# EAGLE board rf-template (EAGLE 6.4)
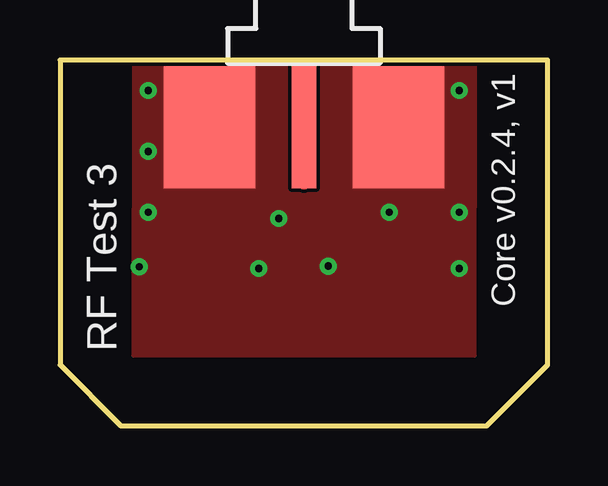
[diagram p0: board, top side]
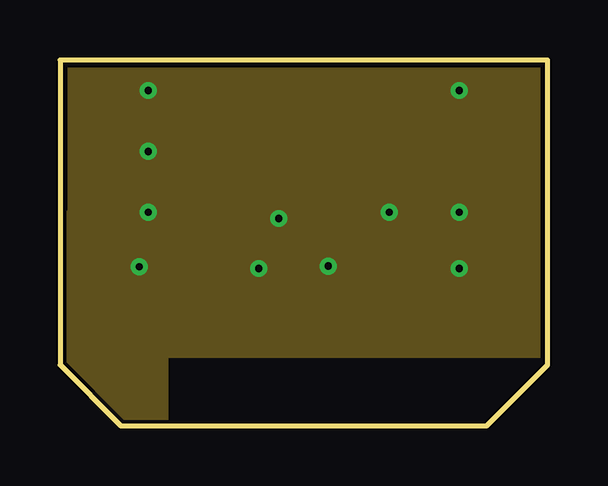
[diagram p1: board, inner layer $GND]
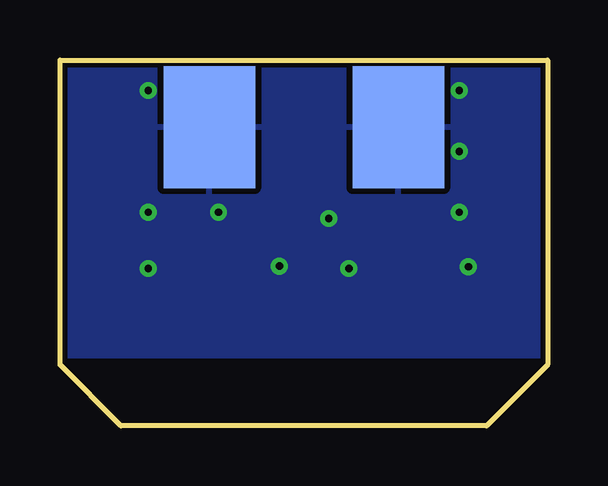
[diagram p2: board, bottom side, seen from below]

Size 20.32 x 15.24 mm. Coordinates in mm from the lower left corner, seen from the top.
Outline: 0,15.24 0,2.54 2.54,0 17.78,0 20.32,2.54 20.32,15.24 0,15.24
Copper layers (1+2*15+16): Top 0.035mm / dielectric 1.5mm / $GND 0.035mm / dielectric 0.15mm / $+3V3 0.035mm / dielectric 0.2mm / Bottom 0.035mm
Design rules "spark": minimum track width 6mil, minimum drill 0.3mm, track to track 6mil, track to pad 6mil, pad to pad 6mil, via to via 6mil, smd to smd 6mil, copper to edge 6mil, drill to drill 6mil, minimum pad ring 12mil, minimum via ring 8mil, stop-mask expansion 4mil, vias tented up to drill 20mil, thermal gap 10mil
Net classes: 2 RF: width 0.635 mm, clearance 0.635 mm; 3 RF2: width 0.584 mm, clearance 1.143 mm

## Footprints (pad centres in the part's own frame; a part is rotated, then mirrored left to right if it is on the bottom)
ANDYW-GENERIC-END-LAUNCH = smd 5.08 x 1.016: 1 2.565,0 | smd 5.08 x 3.81: G@1 2.565,3.937; G@2 2.565,-3.937 | smd 5.08 x 3.81 bottom: G@3 2.565,3.937; G@4 2.565,-3.937

## Placement (x,y rotation side)
X1  SMA-142-0701-881/886  [ANDYW-GENERIC-END-LAUNCH]  10.16,15.01 270 top

## Library data of the parts
X1 = andyw-oct-2011; MF: JOHNSON COMPONENTS; MPN: 142-0701-881; OC_FARNELL: 1608603; OC_NEWARK: 08B906

## Nets
GND [vcc]: X1.G@1 X1.G@2 X1.G@3 X1.G@4
N$4 [RF]: X1.1

## Tracks (layer width: path | path; a pad name or v marks a point on that pad's centre or on a via)
GND  (via drill 0.3)
  other vias: 3.3,6.63 3.68,13.97 3.68,11.43 16.64,13.97 16.64,8.89 13.72,8.89 3.68,8.89 9.12,8.64 16.64,6.55 11.18,6.65 8.28,6.55
  pour $GND (isolate 0.203): 0,15.24 20.32,15.24 20.32,2.92 0,2.92
  pour Top (no thermals): 3.05,2.92 3.07,15.24 17.3,15.24 17.27,2.92
  pour $GND: 4.45,8.89 4.45,0 2.92,0 2.54,0 0.38,2.16 0,2.54 0,8.25 0,8.89
  pour Top: 0,2.54 0,8.25 0,8.89
  pour Bottom (isolate 0.203): 0,15.24 20.32,15.24 20.32,2.92 0,2.92
N$4
  Top 0.635: 10.16,10.16 X1.1

## Text on the board
tPlace: Core v0.2.4, v1 | RF Test 3